# EAGLE board matrix-m24sr_gerber_bottom (EAGLE 7.7.0), part 1 of 7
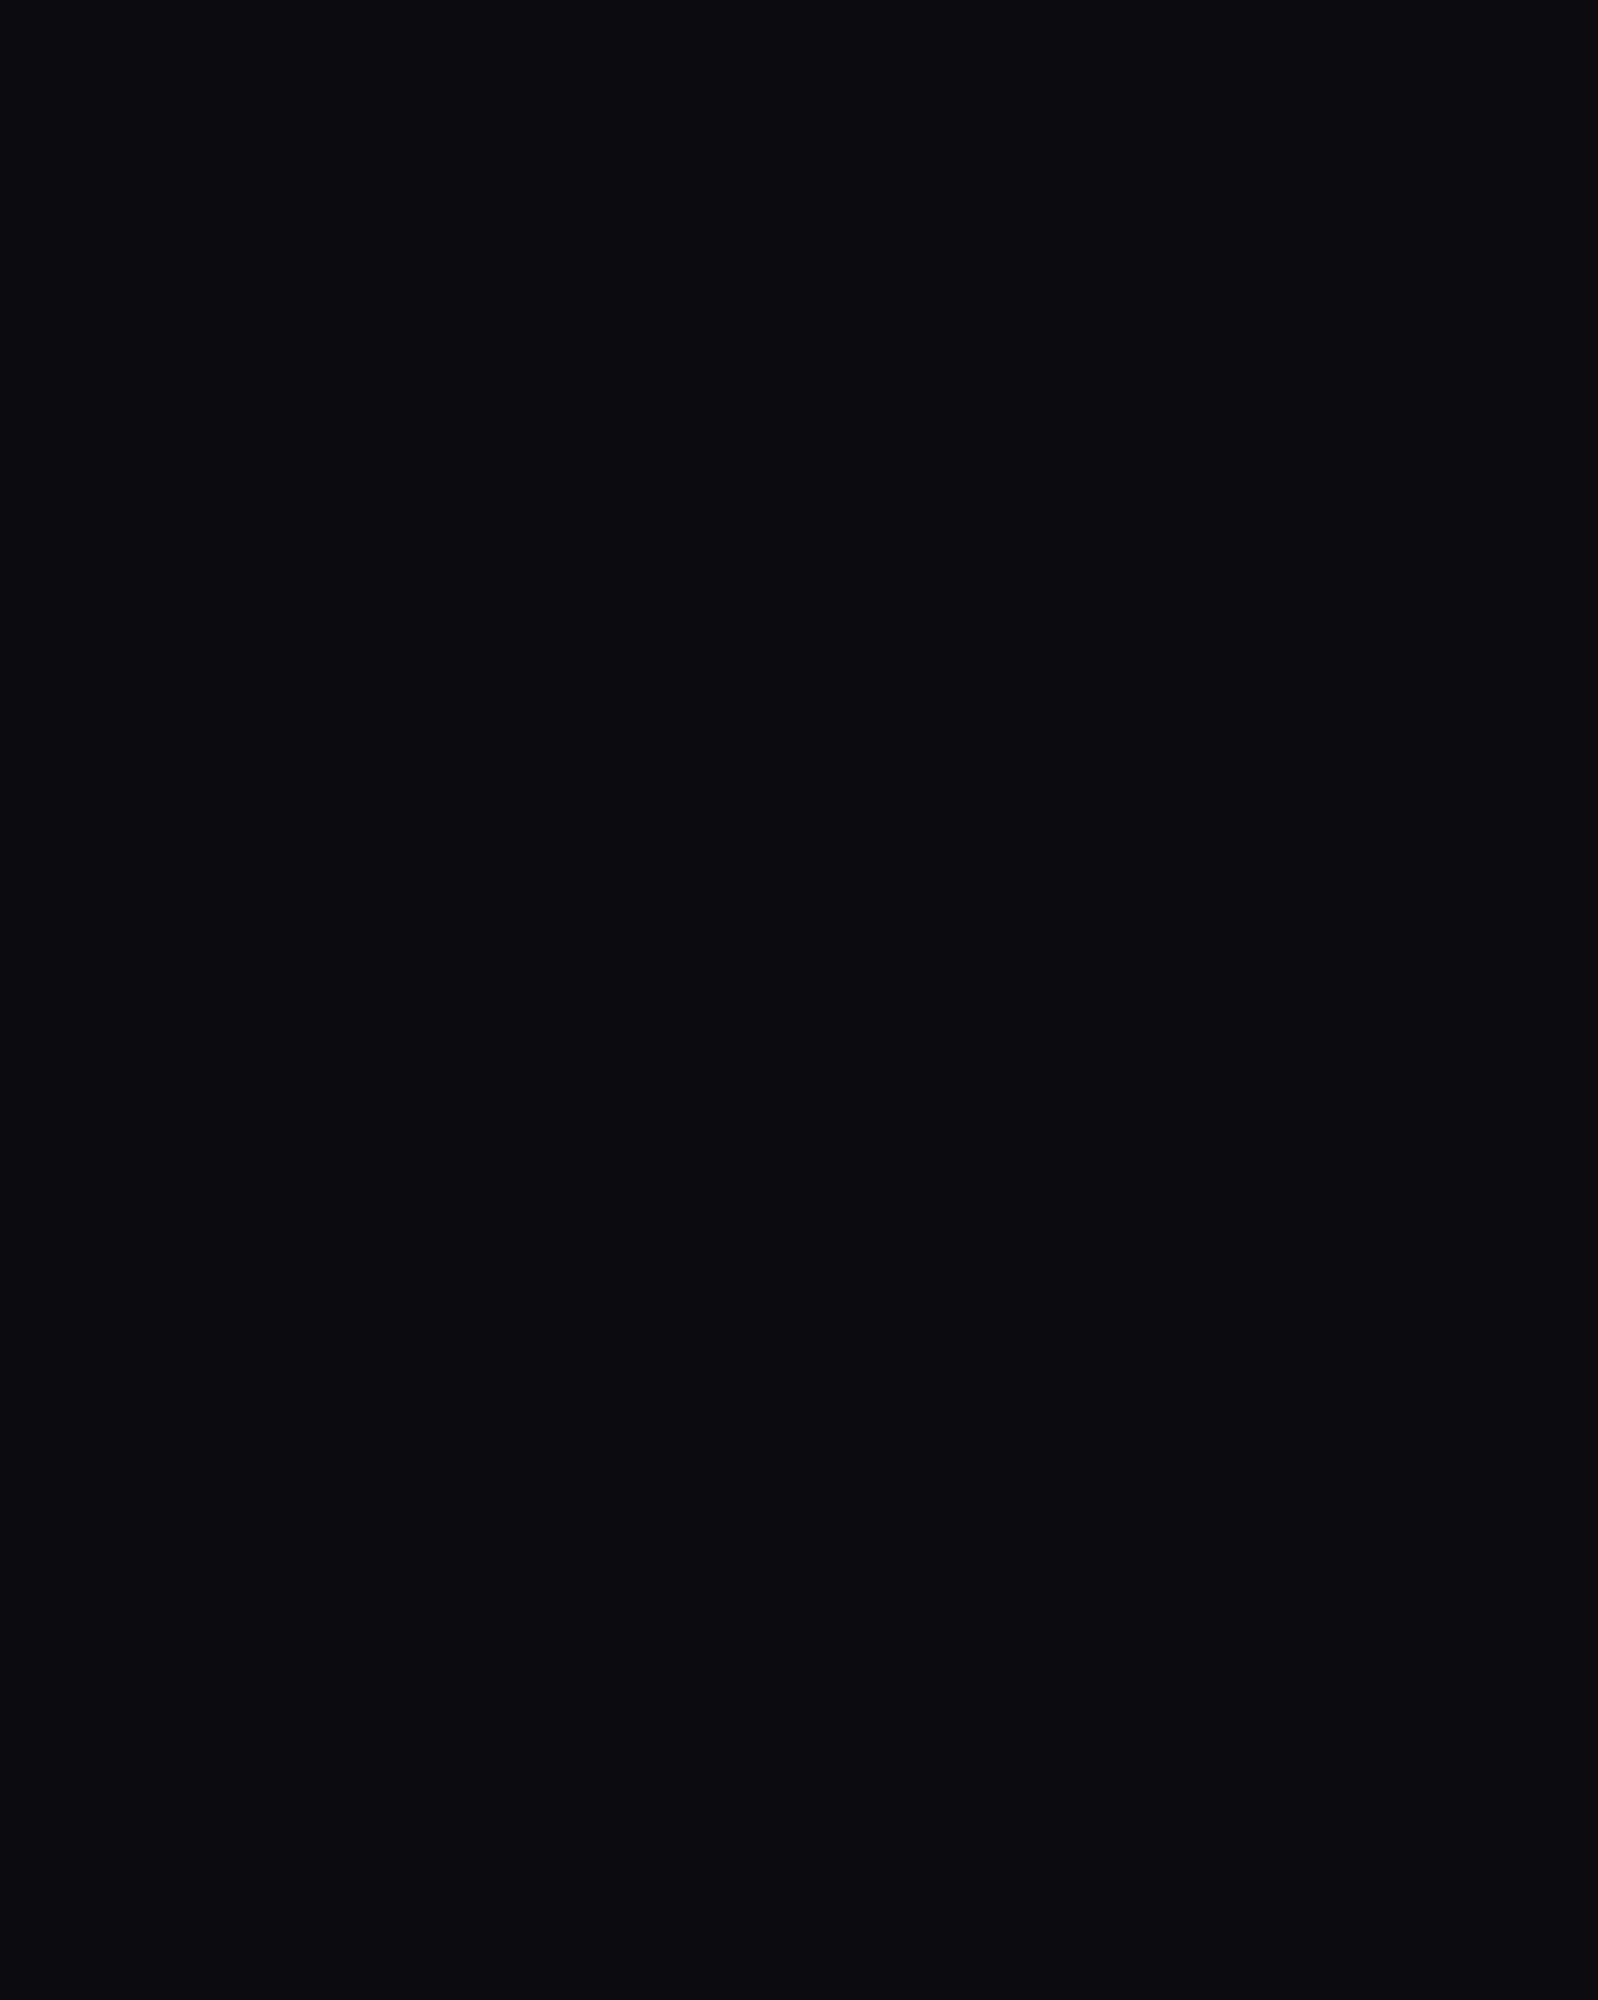
[diagram p0: board, top side]
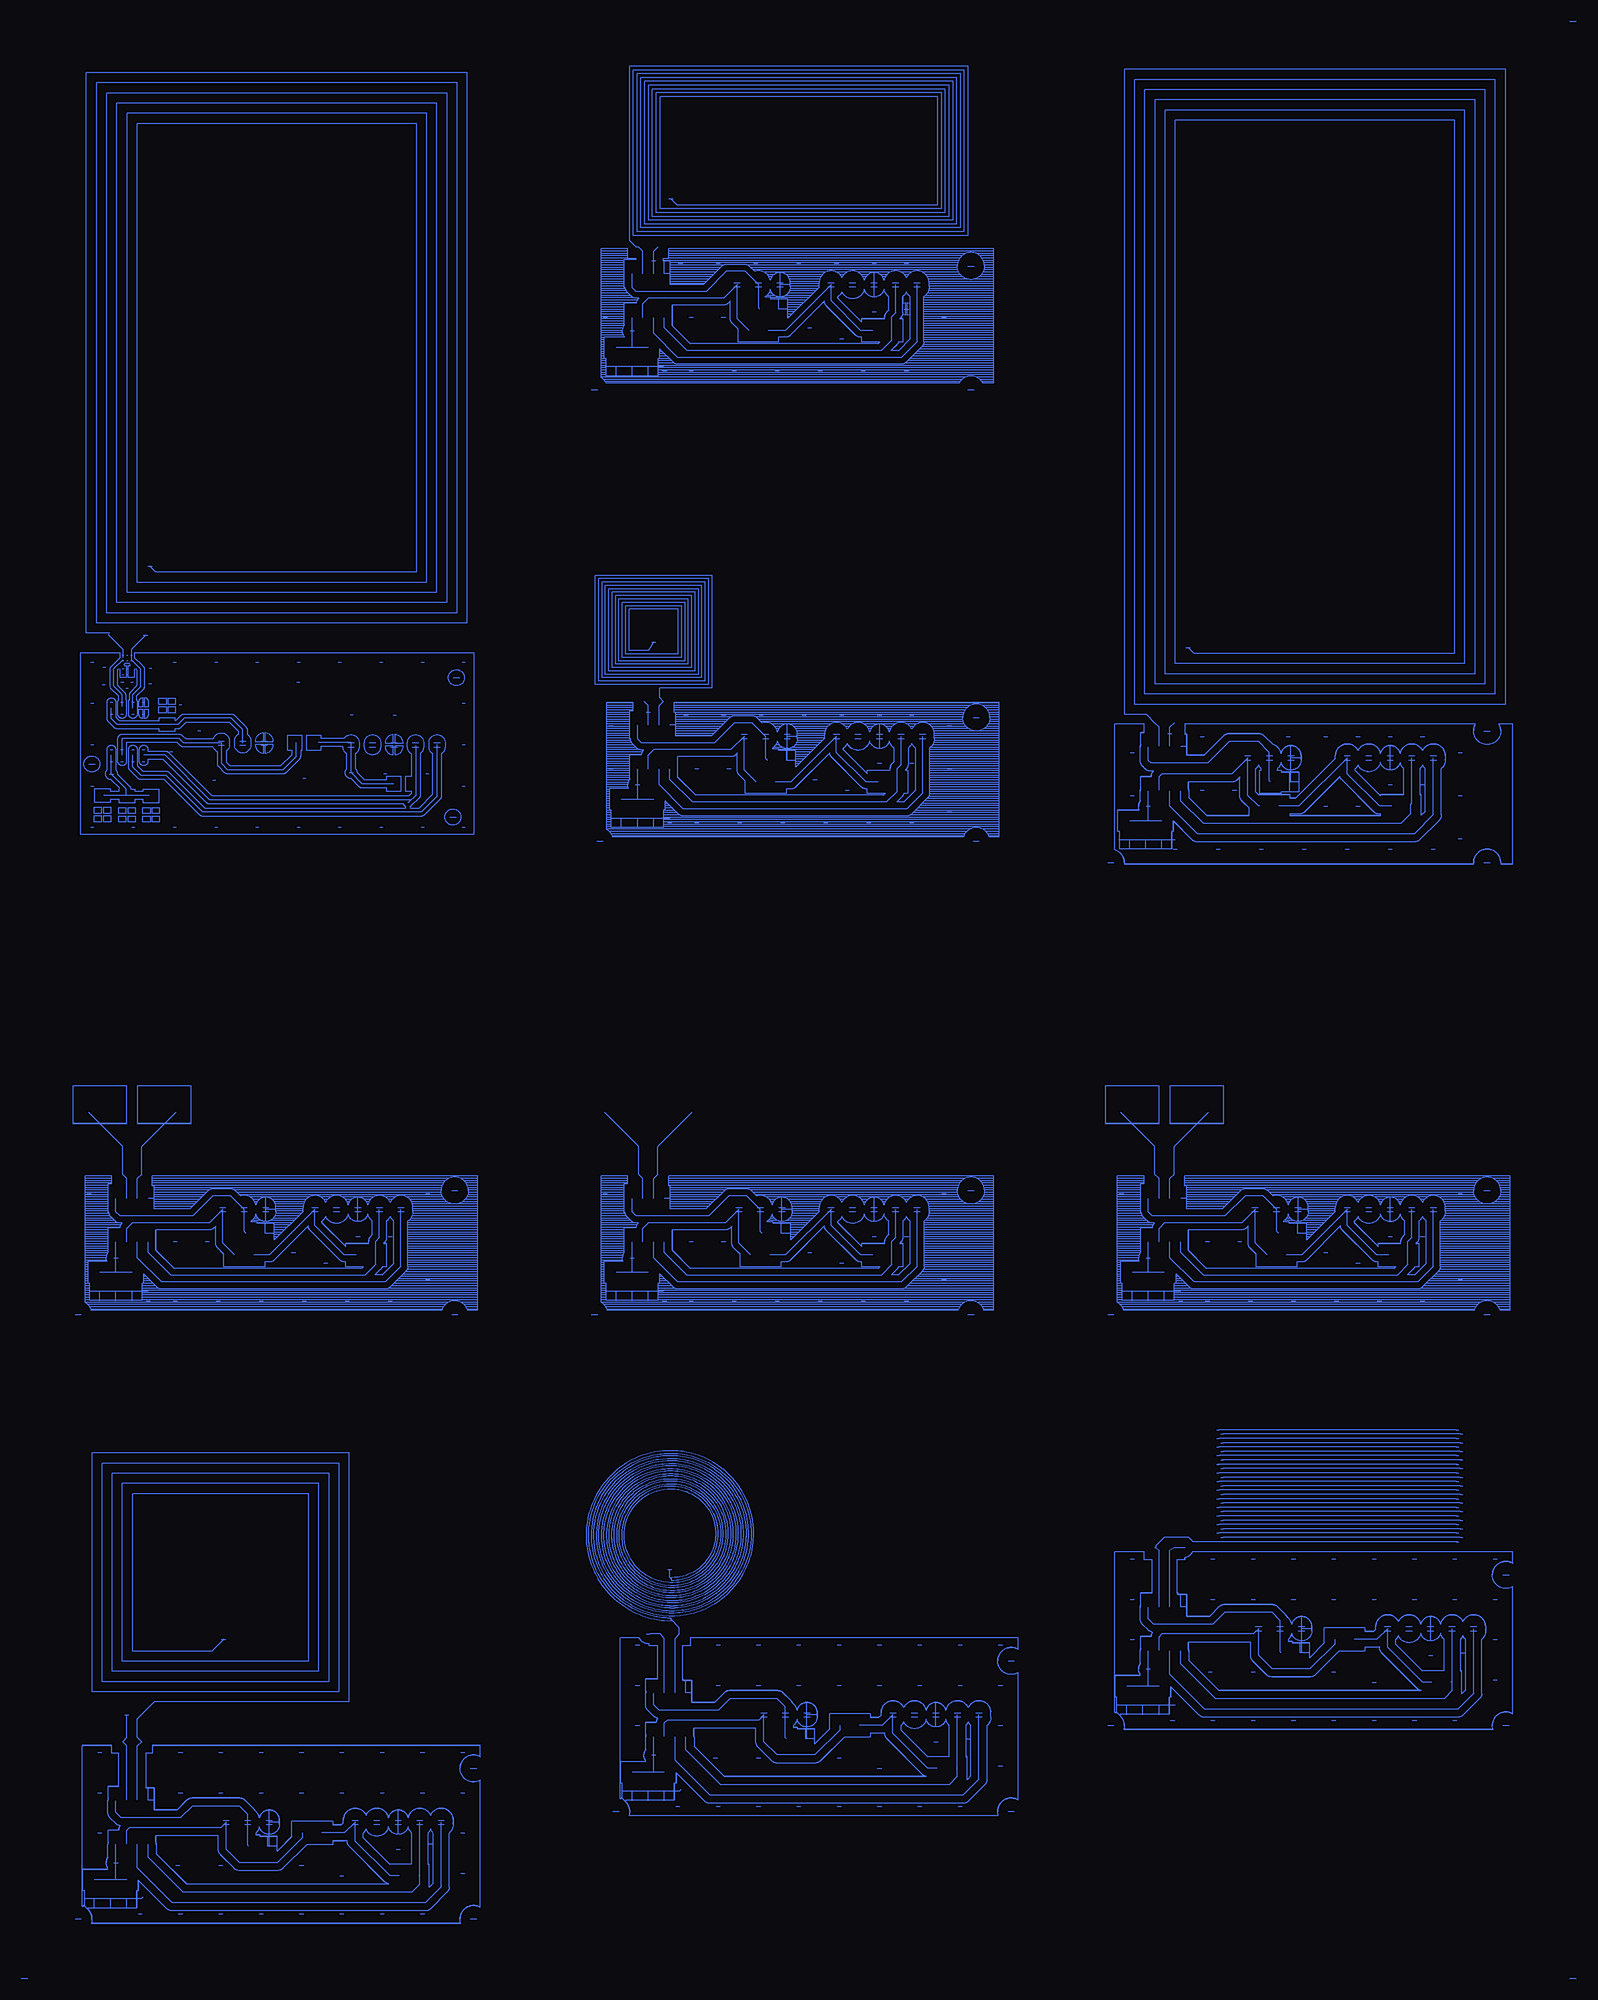
[diagram p1: board, bottom side, seen from below]

No outline drawn. Coordinates in mm, seen from the top.
Copper layers (1*16): Top 0.035mm / dielectric 1.5mm / Bottom 0.035mm
Design rules "default": minimum track width 10mil, minimum drill 24mil, track to track 8mil, track to pad 8mil, pad to pad 8mil, via to via 8mil, smd to smd 8mil, copper to edge 40mil, drill to drill 8mil, minimum pad ring 10mil, minimum via ring 8mil, stop-mask expansion 4mil, vias tented up to drill 0mil, thermal gap 10mil

## Placement (x,y rotation side)

## Tracks (layer width: path | path; a pad name or v marks a point on that pad's centre or on a via)
S$1
  Bottom 0.025: 155.29,85.33 154.63,85.33 154.52,85.36 154.42,85.39 154.28,85.46 154.19,85.54 150.15,89.58 150.14,89.56 150.11,89.38 150.06,89.28 149.98,89.16 149.89,89.06 146.4,85.57 146.28,85.48 146.15,85.41 146.04,85.37 145.95,85.36 145.71,85.35 | 155.29,85.33 155.29,84.78 160.1,84.78 160.1,86.26 | 160.1,86.26 160.1,86.27 160.71,86.89 160.89,87.07 160.96,87.17 161,87.25 161.04,87.4 161.06,87.53 161.06,87.57 | 161.06,87.57 161.06,89.55 | 161.06,89.55 161.07,89.55 161.26,89.36 161.36,89.27 161.54,89.19 161.71,89.14 168.12,89.14 168.12,86.74 165.98,84.6 | 143.79,84.6 143.78,84.6 143.61,84.78 145.71,84.79 | 145.71,84.79 145.71,85.35 | 143.79,84.6 143.61,84.78 145.71,84.78 145.71,84.79 | 143.79,84.6 165.98,84.6 | 165.98,84.6 168.12,86.74 168.12,89.14 161.8,89.14 161.75,89.14 161.69,89.15 161.63,89.16 161.58,89.17 161.52,89.19 161.47,89.22 161.42,89.24 161.37,89.27 161.32,89.31 161.28,89.34 161.23,89.38 161.06,89.56 161.06,89.55 | 161.06,87.57 161.06,87.55 161.06,87.5 161.05,87.44 161.04,87.38 161.02,87.33 161.01,87.27 160.98,87.22 160.96,87.17 160.93,87.12 160.89,87.07 160.86,87.03 160.81,86.98 160.1,86.26 | 155.29,85.33 154.72,85.33 154.66,85.33 154.6,85.34 154.55,85.35 154.49,85.36 154.44,85.39 154.38,85.41 154.33,85.43 154.28,85.46 154.24,85.5 154.19,85.53 154.15,85.57 150.14,89.58 150.14,89.52 150.13,89.47 150.11,89.41 150.09,89.36 150.07,89.31 150.04,89.26 150.01,89.21 149.98,89.16 149.95,89.12 149.91,89.08 146.41,85.57 146.36,85.53 146.32,85.5 146.27,85.47 146.22,85.44 146.17,85.42 146.12,85.4 146.06,85.38 146.01,85.36 145.96,85.36 145.9,85.35 145.71,85.35
S$3
  Bottom 0.025: 82.57,145.99 82.56,145.99 82.35,146.03 82.23,146.06 82.03,146.16 81.92,146.25 81.78,146.37 81.64,146.55 81.57,146.69 81.53,146.79 81.5,146.89 81.49,146.89 81.46,146.76 81.4,146.61 81.35,146.5 81.26,146.36 81.16,146.24 81.01,146.1 80.95,146.06 80.95,146.05 | 82.57,145.99 82.79,145.99 82.98,146.03 83.1,146.06 83.29,146.16 83.43,146.26 83.57,146.4 83.57,146.41 83.61,146.44 83.69,146.56 83.74,146.66 83.8,146.78 83.82,146.89 83.83,146.89 83.86,146.78 83.91,146.64 83.97,146.51 84.05,146.38 84.21,146.2 84.4,146.03 84.54,145.95 84.68,145.88 84.89,145.82 85.13,145.78 85.31,145.78 85.31,145.79 85.47,145.81 85.62,145.84 85.81,145.92 85.95,146 86.08,146.09 86.19,146.19 86.32,146.34 86.42,146.48 86.46,146.56 86.47,146.58 86.49,146.57 86.57,146.41 86.69,146.25 86.83,146.13 86.94,146.04 86.94,145.86 84.11,143.04 | 84.11,143.42 81.42,143.42 | 81.42,143.42 81.42,143.65 | 81.42,143.65 81.42,143.66 81.39,143.83 81.35,143.96 81.31,144.04 81.25,144.15 81.16,144.25 80.95,144.45 80.95,144.46 | 80.95,144.46 80.95,146.05 | 80.95,144.46 81.17,144.24 81.18,144.22 81.22,144.18 81.25,144.13 81.29,144.09 81.32,144.04 81.34,143.99 81.36,143.93 81.38,143.88 81.39,143.82 81.4,143.76 81.41,143.71 81.42,143.65 | 81.42,143.42 84.11,143.42 | 84.11,143.04 84.11,143.42 | 84.11,143.04 86.94,145.87 86.94,146.04 86.9,146.06 86.83,146.12 86.75,146.19 86.69,146.26 86.62,146.34 86.57,146.42 86.52,146.5 86.47,146.59 86.44,146.52 86.39,146.43 86.33,146.35 86.27,146.28 86.21,146.21 86.14,146.14 86.06,146.07 85.98,146.02 85.9,145.97 85.81,145.92 85.72,145.88 85.63,145.85 85.53,145.82 85.44,145.8 85.34,145.79 85.25,145.78 85.15,145.78 85.05,145.79 84.95,145.8 84.86,145.82 84.76,145.85 84.67,145.89 84.58,145.93 84.5,145.97 84.41,146.03 84.33,146.08 84.26,146.15 84.19,146.22 84.12,146.29 84.06,146.37 84.01,146.45 83.96,146.53 83.92,146.62 83.88,146.71 83.85,146.8 83.83,146.9 83.83,146.89 83.8,146.81 83.77,146.73 83.74,146.65 83.7,146.58 83.66,146.51 83.6,146.44 83.55,146.38 83.49,146.32 83.43,146.26 83.36,146.21 83.29,146.16 83.22,146.12 83.15,146.09 83.07,146.06 82.99,146.03 82.91,146.01 82.82,146 82.74,145.99 82.66,145.98 82.57,145.99
  Bottom 0.025: 82.57,145.99 82.49,146 82.41,146.01 82.33,146.03 82.25,146.06 82.17,146.09 82.09,146.13 82.02,146.17 81.95,146.22 81.89,146.27 81.83,146.32 81.77,146.38 81.71,146.45 81.66,146.52 81.62,146.59 81.58,146.66 81.55,146.74 81.52,146.82 81.5,146.9 81.49,146.85 81.46,146.75 81.42,146.66 81.39,146.57 81.34,146.49 81.29,146.4 81.23,146.32 81.17,146.25 81.1,146.18 81.03,146.11 80.95,146.05
S$4
  Bottom 0.025: 93.7,141.21 93.03,141.21 92.93,141.24 92.82,141.27 92.69,141.34 92.59,141.42 88.55,145.46 88.54,145.44 88.55,145.44 88.51,145.26 88.46,145.16 88.38,145.04 88.3,144.94 84.8,141.45 84.68,141.36 84.56,141.29 84.45,141.25 84.35,141.24 84.11,141.23 | 93.7,141.21 93.7,140.66 98.5,140.66 98.5,142.14 | 98.5,142.14 98.5,142.15 99.12,142.77 99.3,142.95 99.36,143.04 99.4,143.13 99.45,143.28 99.47,143.41 99.47,143.45 | 99.47,143.45 99.47,145.43 | 99.47,145.43 99.67,145.24 99.77,145.15 99.94,145.07 100.11,145.02 106.52,145.02 106.52,142.62 104.38,140.48 | 82.19,140.48 82.19,140.49 82.02,140.66 84.11,140.67 | 84.11,140.67 84.11,141.23 | 82.19,140.48 82.01,140.66 84.11,140.66 84.11,140.67 | 82.19,140.48 104.38,140.48 | 104.38,140.48 106.52,142.62 106.52,145.02 100.21,145.02 100.15,145.02 100.09,145.03 100.03,145.04 99.98,145.05 99.93,145.07 99.87,145.1 99.82,145.12 99.77,145.15 99.72,145.19 99.68,145.22 99.64,145.26 99.47,145.44 99.47,145.43 | 99.47,143.45 99.46,143.43 99.46,143.38 99.45,143.32 99.44,143.26 99.43,143.21 99.41,143.15 99.39,143.1 99.36,143.05 99.33,143 99.3,142.95 99.26,142.91 99.22,142.87 98.5,142.14 | 93.7,141.21 93.12,141.21 93.07,141.21 93.01,141.22 92.95,141.23 92.9,141.24 92.84,141.26 92.79,141.29 92.74,141.31 92.69,141.34 92.64,141.38 92.6,141.41 92.55,141.45 88.55,145.46 88.54,145.4 88.53,145.35 88.52,145.29 88.5,145.24 88.48,145.19 88.45,145.14 88.42,145.09 88.39,145.04 88.35,145 88.32,144.96 84.81,141.45 84.77,141.41 84.72,141.38 84.68,141.35 84.63,141.32 84.58,141.3 84.52,141.28 84.47,141.26 84.42,141.24 84.36,141.24 84.31,141.23 84.11,141.23
S$5
  Bottom 0.025: 23.45,90.85 23.4,90.73 23.34,90.63 23.16,90.42 22.99,90.29 22.82,90.2 22.72,90.16 22.57,90.12 22.49,90.11 22.49,90.1 22.2,90.1 21.99,90.15 21.86,90.2 21.68,90.3 21.53,90.41 21.41,90.54 21.31,90.69 21.25,90.78 21.19,90.93 21.18,91 21.17,91 21.13,90.88 21.06,90.7 21.01,90.6 20.87,90.4 20.71,90.24 20.62,90.17 | 23.45,90.85 23.47,90.89 23.5,91 23.51,91 23.52,90.94 23.58,90.75 23.68,90.56 23.81,90.38 24.01,90.19 24.2,90.07 24.34,90 24.48,89.95 24.73,89.9 25.05,89.9 25.05,89.91 25.14,89.92 25.29,89.96 25.41,90 25.65,90.12 25.81,90.25 25.93,90.37 26.05,90.52 26.15,90.7 26.16,90.7 26.18,90.66 26.26,90.51 26.39,90.36 26.46,90.28 26.61,90.16 26.61,89.98 23.79,87.16 | 23.79,87.54 21.09,87.54 | 21.09,87.54 21.09,87.77 | 21.09,87.77 21.09,87.85 21.08,87.86 21.08,87.91 21.04,88.04 20.98,88.17 20.92,88.27 20.83,88.37 20.62,88.57 20.62,88.58 | 20.62,88.58 20.62,90.17 | 20.62,88.58 20.85,88.36 20.86,88.34 20.89,88.3 20.93,88.25 20.96,88.21 20.99,88.16 21.02,88.11 21.04,88.05 21.06,88 21.07,87.94 21.08,87.88 21.09,87.83 21.09,87.77 | 21.09,87.54 23.79,87.54 | 23.79,87.16 23.79,87.54 | 23.79,87.16 26.61,89.98 26.61,90.16 26.58,90.18 26.5,90.24 26.43,90.31 26.36,90.38 26.3,90.46 26.24,90.54 26.19,90.62 26.15,90.71 26.11,90.64 26.06,90.55 26.01,90.47 25.95,90.4 25.88,90.33 25.81,90.26 25.73,90.19 25.66,90.14 25.57,90.09 25.49,90.04 25.4,90 25.3,89.97 25.21,89.94 25.12,89.92 25.02,89.91 24.92,89.9 24.82,89.9 24.72,89.91 24.63,89.92 24.53,89.94 24.44,89.97 24.35,90.01 24.26,90.05 24.17,90.09 24.09,90.14 24.01,90.2 23.93,90.27 23.86,90.33 23.8,90.41 23.74,90.48 23.68,90.57 23.64,90.65 23.59,90.74 23.56,90.83 23.53,90.92 23.5,91.02 23.5,91.01 23.48,90.93 23.45,90.85
  Bottom 0.025: 23.45,90.85 23.41,90.77 23.37,90.7 23.33,90.63 23.28,90.56 23.23,90.5 23.17,90.44 23.1,90.38 23.04,90.33 22.97,90.28 22.9,90.24 22.82,90.21 22.74,90.17 22.66,90.15 22.58,90.13 22.5,90.12 22.42,90.11 22.33,90.1 22.25,90.11 22.16,90.12 22.08,90.13 22,90.15 21.92,90.18 21.84,90.21 21.77,90.25 21.7,90.29 21.63,90.34 21.56,90.39 21.5,90.44 21.44,90.5 21.39,90.57 21.34,90.64 21.3,90.71 21.26,90.78 21.22,90.86 21.19,90.94 21.17,91.02 21.16,90.97 21.13,90.87 21.1,90.78 21.06,90.69 21.02,90.61 20.96,90.52 20.91,90.44 20.84,90.37 20.77,90.3 20.7,90.23 20.62,90.17
S$7
  Bottom 0.025: 79.93,90.17 79.81,90.27 79.64,90.46 79.55,90.59 79.49,90.71 | 79.93,90.17 79.93,88.23 | 79.93,88.23 79.93,88.2 79.95,88.06 79.98,87.92 80.04,87.82 80.14,87.69 80.28,87.54 79.94,87.54 | 79.94,87.54 79.94,84.79 | 79.94,84.79 80.43,84.78 | 80.43,84.78 80.48,84.68 80.55,84.54 80.64,84.45 | 80.64,84.45 81.29,83.8 | 80.43,83.8 80.42,83.8 79.05,85.18 | 79.49,90.71 79.36,90.48 79.25,90.36 79.11,90.22 79.05,90.17 | 79.05,85.18 79.05,90.17 | 79.05,85.18 80.43,83.8 | 80.43,83.8 81.29,83.8 | 80.64,84.45 81.29,83.8 | 80.64,84.45 80.6,84.48 80.57,84.53 80.53,84.57 80.5,84.62 80.48,84.67 80.45,84.72 80.43,84.78 | 80.43,84.78 79.94,84.78 79.94,84.79 | 79.94,87.54 80.28,87.54 80.17,87.64 80.16,87.66 80.12,87.7 80.09,87.74 80.06,87.79 80.03,87.84 80,87.89 79.98,87.95 79.96,88 79.95,88.06 79.94,88.11 79.93,88.17 79.93,88.23 | 79.93,90.17 79.92,90.18 79.84,90.24 79.77,90.31 79.7,90.38 79.64,90.46 79.58,90.54 79.53,90.62 79.49,90.71 | 79.49,90.71 79.48,90.69 79.44,90.61 79.38,90.52 79.33,90.44 79.26,90.37 79.19,90.3 79.12,90.23 79.05,90.17
S$8
  Bottom 0.025: 140.89,90.17 140.77,90.27 140.6,90.46 140.51,90.59 140.45,90.71 | 140.89,90.17 140.89,88.23 | 140.89,88.23 140.89,88.2 140.91,88.06 140.94,87.92 141,87.82 141.1,87.69 141.24,87.54 140.9,87.54 | 140.9,87.54 140.9,84.79 | 140.9,84.79 141.39,84.78 | 141.39,84.78 141.44,84.68 141.51,84.54 141.6,84.45 | 141.6,84.45 142.25,83.8 | 141.39,83.8 141.38,83.8 140,85.18 | 140.45,90.71 140.32,90.48 140.21,90.36 140.07,90.22 140,90.17 | 140,85.18 140,90.17 | 140,85.18 141.39,83.8 | 141.39,83.8 142.25,83.8 | 141.6,84.45 142.25,83.8 | 141.6,84.45 141.56,84.48 141.53,84.53 141.49,84.57 141.46,84.62 141.44,84.67 141.41,84.72 141.39,84.78 | 141.39,84.78 140.9,84.78 140.9,84.79 | 140.9,87.54 141.24,87.54 141.13,87.64 141.12,87.66 141.08,87.7 141.05,87.74 141.02,87.79 140.99,87.84 140.96,87.89 140.94,87.95 140.92,88 140.91,88.06 140.9,88.11 140.89,88.17 140.89,88.23 | 140.89,90.17 140.88,90.18 140.8,90.24 140.73,90.31 140.66,90.38 140.6,90.46 140.54,90.54 140.49,90.62 140.45,90.71 | 140.45,90.71 140.44,90.69 140.4,90.61 140.34,90.52 140.29,90.44 140.22,90.37 140.16,90.3 140.08,90.23 140,90.17
S$9
  Bottom 0.025: 94.33,85.33 93.67,85.33 93.56,85.36 93.46,85.39 93.33,85.46 93.23,85.54 89.19,89.58 89.18,89.56 89.15,89.38 89.1,89.28 89.02,89.16 88.93,89.06 85.44,85.57 85.32,85.48 85.19,85.41 85.08,85.37 84.99,85.36 84.75,85.35 | 94.33,85.33 94.33,84.78 99.14,84.78 99.14,86.26 | 99.14,86.26 99.14,86.27 99.75,86.89 99.93,87.07 100,87.17 100.04,87.25 100.08,87.4 100.1,87.53 100.1,87.57 | 100.1,87.57 100.1,89.55 | 100.1,89.55 100.11,89.55 100.3,89.36 100.4,89.27 100.58,89.19 100.75,89.14 107.16,89.14 107.16,86.74 105.02,84.6 | 82.83,84.6 82.82,84.6 82.65,84.78 84.75,84.79 | 84.75,84.79 84.75,85.35 | 82.83,84.6 82.65,84.78 84.75,84.78 84.75,84.79 | 82.83,84.6 105.02,84.6 | 105.02,84.6 107.16,86.74 107.16,89.14 100.84,89.14 100.78,89.14 100.73,89.15 100.67,89.16 100.62,89.17 100.56,89.19 100.51,89.22 100.46,89.24 100.41,89.27 100.36,89.31 100.31,89.34 100.27,89.38 100.1,89.56 100.1,89.55 | 100.1,87.57 100.1,87.55 100.1,87.5 100.09,87.44 100.08,87.38 100.06,87.33 100.05,87.27 100.02,87.22 100,87.17 99.97,87.12 99.93,87.07 99.9,87.03 99.86,86.98 99.14,86.26 | 94.33,85.33 93.76,85.33 93.7,85.33 93.64,85.34 93.59,85.35 93.53,85.36 93.48,85.39 93.42,85.41 93.37,85.43 93.32,85.46 93.28,85.5 93.23,85.53 93.19,85.57 89.18,89.58 89.18,89.52 89.17,89.47 89.15,89.41 89.13,89.36 89.11,89.31 89.08,89.26 89.06,89.21 89.02,89.16 88.99,89.12 88.95,89.08 85.45,85.57 85.4,85.53 85.36,85.5 85.31,85.47 85.26,85.44 85.21,85.42 85.16,85.4 85.11,85.38 85.05,85.36 85,85.36 84.94,85.35 84.75,85.35
S$10
  Bottom 0.025: 33.37,85.33 32.71,85.33 32.6,85.36 32.5,85.39 32.37,85.46 32.27,85.54 28.23,89.58 28.22,89.56 28.19,89.38 28.14,89.28 28.06,89.16 27.97,89.06 24.48,85.57 24.36,85.48 24.23,85.41 24.12,85.37 24.03,85.36 23.79,85.35 | 33.37,85.33 33.37,84.78 38.18,84.78 38.18,86.26 | 38.18,86.26 38.18,86.27 38.79,86.89 38.97,87.07 39.03,87.17 39.08,87.25 39.12,87.4 39.14,87.53 39.14,87.57 | 39.14,87.57 39.14,89.55 | 39.14,89.55 39.15,89.55 39.34,89.36 39.44,89.27 39.62,89.19 39.79,89.14 46.2,89.14 46.2,86.74 44.06,84.6 | 21.87,84.6 21.86,84.6 21.69,84.78 23.79,84.79 | 23.79,84.79 23.79,85.35 | 21.87,84.6 21.69,84.78 23.79,84.78 23.79,84.79 | 21.87,84.6 44.06,84.6 | 44.06,84.6 46.2,86.74 46.2,89.14 39.88,89.14 39.83,89.14 39.77,89.15 39.71,89.16 39.66,89.17 39.6,89.19 39.55,89.22 39.5,89.24 39.45,89.27 39.4,89.31 39.35,89.34 39.31,89.38 39.14,89.56 39.14,89.55 | 39.14,87.57 39.14,87.55 39.14,87.5 39.13,87.44 39.12,87.38 39.1,87.33 39.09,87.27 39.06,87.22 39.03,87.17 39.01,87.12 38.97,87.07 38.94,87.03 38.9,86.98 38.18,86.26 | 33.37,85.33 32.8,85.33 32.74,85.33 32.69,85.34 32.63,85.35 32.57,85.36 32.52,85.39 32.46,85.41 32.41,85.43 32.36,85.46 32.32,85.5 32.27,85.53 32.23,85.57 28.22,89.58 28.22,89.52 28.21,89.47 28.19,89.41 28.17,89.36 28.15,89.31 28.12,89.26 28.09,89.21 28.06,89.16 28.03,89.12 27.99,89.08 24.49,85.57 24.44,85.53 24.4,85.5 24.35,85.47 24.3,85.44 24.25,85.42 24.2,85.4 24.14,85.38 24.09,85.36 24.04,85.36 23.98,85.35 23.79,85.35
S$11
  Bottom 0.025: 177.91,101.72 171.56,101.72 | 171.56,101.72 171.56,106.16 | 171.56,106.16 177.91,106.16 | 177.91,106.16 177.91,101.72 | 177.91,101.72 177.91,101.71 171.56,101.71 171.56,101.72 | 171.56,106.16 177.91,106.16
S$12
  Bottom 0.025: 170.29,101.72 163.94,101.72 | 163.94,101.72 163.94,106.16 | 163.94,106.16 170.29,106.16 | 170.29,106.16 170.29,101.72 | 170.29,101.72 170.29,101.71 163.94,101.71 163.94,101.72 | 163.94,106.16 170.29,106.16
S$13
  Bottom 0.025: 18.85,143.61 18.71,143.75 18.6,143.92 18.54,144.04 18.53,144.04 18.51,144.02 18.47,143.94 18.38,143.8 18.3,143.7 18.21,143.61 | 18.85,143.61 18.85,140.57 | 18.85,140.57 18.66,140.56 | 18.66,138.12 18.21,138.57 | 18.21,138.57 18.21,143.61 | 18.21,138.57 18.66,138.12 | 18.66,138.12 18.66,140.56 | 18.66,140.56 18.85,140.56 18.85,140.57 | 18.85,143.61 18.81,143.65 18.74,143.72 18.68,143.8 18.62,143.88 18.57,143.96 18.53,144.05 18.51,144 18.46,143.92 18.41,143.84 18.34,143.76 18.28,143.68 18.21,143.61
S$14
  Bottom 0.025: 34.22,138.23 33.01,138.23 32.89,138.26 32.77,138.3 32.66,138.36 32.56,138.42 32.49,138.48 28.31,142.65 28.23,142.51 28.16,142.4 27.92,142.15 24.26,138.48 24.11,138.37 23.95,138.29 23.74,138.24 23.47,138.23 | 34.22,138.23 34.22,138.06 | 34.22,138.06 23.47,138.06 | 23.47,138.06 23.47,138.23 | 23.47,138.06 34.22,138.06 | 34.22,138.23 33.12,138.23 33.05,138.23 32.98,138.24 32.92,138.25 32.85,138.27 32.79,138.29 32.73,138.32 32.67,138.35 32.61,138.38 32.56,138.42 32.51,138.46 32.46,138.51 28.31,142.66 28.31,142.65 28.28,142.59 28.25,142.53 28.22,142.47 28.18,142.41 28.14,142.36 28.09,142.32 24.27,138.49 24.22,138.45 24.17,138.41 24.11,138.37 24.06,138.34 24,138.31 23.93,138.28 23.87,138.26 23.8,138.25 23.74,138.23 23.68,138.23 23.61,138.23 23.47,138.23
S$15
  Bottom 0.025: 46.15,140.97 46.16,141.13 46.2,141.28 46.2,142.04 40.95,142.04 40.83,142.07 40.7,142.11 40.59,142.17 40.49,142.23 40.43,142.29 40.13,142.59 40.12,142.59 | 46.15,140.97 46.15,140.21 | 46.15,140.21 44.01,138.06 39.03,138.06 | 39.03,138.06 39.03,138.97 | 39.03,138.97 39.68,139.62 39.92,139.87 39.99,139.97 40.03,140.07 40.06,140.12 40.1,140.24 40.12,140.41 40.12,140.45 | 40.12,140.45 40.12,142.59 | 39.03,138.06 44,138.06 46.15,140.21 | 46.15,140.97 46.15,140.99 46.15,141.02 46.15,141.08 46.16,141.15 46.17,141.21 46.2,141.28 46.2,142.04 41.05,142.04 40.99,142.04 40.92,142.05 40.86,142.06 40.79,142.08 40.73,142.1 40.67,142.13 40.61,142.16 40.55,142.19 40.5,142.23 40.45,142.27 40.4,142.32 40.12,142.6 40.12,142.59 | 40.12,140.45 40.12,140.43 40.11,140.37 40.11,140.3 40.09,140.23 40.08,140.17 40.05,140.11 40.03,140.04 40,139.99 39.96,139.93 39.93,139.88 39.88,139.82 39.84,139.78 39.03,138.97
S$16
  Bottom 0.025: 87.2,90.54 87.11,90.71 87.09,90.68 87.05,90.6 86.96,90.46 86.83,90.31 86.72,90.21 86.59,90.12 86.45,90.04 86.25,89.96 86.11,89.93 85.94,89.91 85.94,89.9 85.76,89.9 85.52,89.94 85.32,90 85.17,90.07 85.03,90.16 84.84,90.32 84.68,90.5 84.6,90.64 84.54,90.76 84.49,90.92 84.47,91.01 84.45,90.99 84.43,90.9 84.36,90.75 84.31,90.65 84.24,90.56 | 87.2,90.54 87.33,90.37 87.47,90.25 87.57,90.16 87.57,89.98 84.75,87.16 | 84.75,87.54 82.05,87.54 | 82.05,87.54 82.05,87.77 | 82.05,87.77 82.05,87.78 82.03,87.95 81.99,88.08 81.95,88.16 81.88,88.27 81.8,88.37 81.58,88.57 81.58,88.58 | 83.21,90.11 83.19,90.11 82.99,90.14 82.86,90.19 82.67,90.28 82.55,90.37 82.42,90.48 82.28,90.67 82.21,90.8 82.18,90.87 82.15,90.94 82.14,91.01 82.12,91 82.09,90.89 82.04,90.73 81.99,90.62 81.89,90.48 81.79,90.36 81.64,90.22 81.58,90.17 | 83.21,90.11 83.43,90.11 83.61,90.14 83.74,90.19 83.92,90.28 84.06,90.38 84.21,90.52 84.21,90.53 84.24,90.56 | 81.58,88.58 81.58,90.17 | 81.58,88.58 81.81,88.36 81.82,88.34 81.85,88.3 81.89,88.25 81.92,88.21 81.95,88.16 81.98,88.11 82,88.05 82.02,88 82.03,87.94 82.04,87.88 82.05,87.83 82.05,87.77 | 82.05,87.54 84.75,87.54 | 84.75,87.16 84.75,87.54 | 84.75,87.16 87.57,89.98 87.57,90.16 87.54,90.18 87.46,90.24 87.39,90.31 87.32,90.38 87.26,90.46 87.2,90.54 | 87.2,90.54 87.15,90.62 87.11,90.71 87.07,90.64 87.02,90.55 86.97,90.47 86.91,90.4 86.84,90.33 86.77,90.26 86.69,90.19 86.62,90.14 86.53,90.09 86.45,90.04 86.36,90 86.26,89.97 86.17,89.94 86.08,89.92 85.98,89.91 85.88,89.9 85.78,89.9 85.68,89.91 85.59,89.92 85.49,89.94 85.4,89.97 85.31,90.01 85.22,90.05 85.13,90.09 85.05,90.14 84.97,90.2 84.89,90.27 84.82,90.33 84.76,90.41 84.7,90.48 84.64,90.57 84.59,90.65 84.55,90.74 84.52,90.83 84.49,90.92 84.46,91.02 84.46,91.01 84.44,90.93 84.41,90.85 84.37,90.77 84.33,90.7 84.29,90.63 84.24,90.56
  Bottom 0.025: 84.24,90.56 84.19,90.5 84.13,90.44 84.06,90.38 84,90.33 83.93,90.28 83.86,90.24 83.78,90.21 83.7,90.17 83.62,90.15 83.54,90.13 83.46,90.12 83.38,90.11 83.29,90.1 83.21,90.11 | 83.21,90.11 83.12,90.12 83.04,90.13 82.96,90.15 82.88,90.18 82.8,90.21 82.73,90.25 82.66,90.29 82.59,90.34 82.52,90.39 82.46,90.44 82.4,90.5 82.35,90.57 82.3,90.64 82.25,90.71 82.22,90.78 82.18,90.86 82.15,90.94 82.13,91.02 82.12,90.97 82.09,90.87 82.06,90.78 82.02,90.69 81.98,90.61 81.92,90.52 81.87,90.44 81.8,90.37 81.73,90.3 81.66,90.23 81.58,90.17
S$17
  Bottom 0.025: 79.29,146.05 79.17,146.15 79,146.34 78.91,146.47 78.86,146.58 78.85,146.58 78.78,146.46 78.69,146.33 78.59,146.22 78.47,146.1 78.41,146.06 78.41,146.05 | 79.29,146.05 79.29,144.11 | 79.29,144.11 79.29,144.08 79.31,143.94 79.35,143.8 79.41,143.7 79.5,143.57 79.64,143.42 79.31,143.42 | 79.31,143.42 79.31,140.67 | 79.31,140.67 79.8,140.66 | 79.8,140.66 79.84,140.56 79.92,140.42 80,140.33 | 80,140.33 80.65,139.68 | 79.79,139.68 78.41,141.06 | 78.41,141.06 78.41,146.05 | 78.41,141.06 79.79,139.68 | 79.79,139.68 80.65,139.68 | 80,140.33 80.65,139.68 | 80,140.33 79.97,140.36 79.93,140.41 79.9,140.45 79.87,140.5 79.84,140.55 79.82,140.6 79.8,140.66 | 79.8,140.66 79.31,140.66 79.31,140.67 | 79.31,143.42 79.65,143.42 79.54,143.53 79.53,143.53 79.49,143.58 79.45,143.62 79.42,143.67 79.39,143.72 79.37,143.77 79.34,143.83 79.33,143.88 79.31,143.94 79.3,144 79.3,144.05 79.29,144.11 | 79.29,146.05 79.28,146.06 79.2,146.12 79.13,146.19 79.07,146.26 79,146.34 78.95,146.42 78.9,146.5 78.85,146.59 78.85,146.57 78.8,146.49 78.75,146.4 78.69,146.32 78.63,146.25 78.56,146.18 78.49,146.11 78.41,146.05
S$18
  Bottom 0.025: 145.71,87.16 148.53,89.98 148.53,90.16 148.43,90.25 148.28,90.37 148.16,90.54 148.07,90.71 148.05,90.68 148.01,90.6 147.92,90.46 147.78,90.31 147.68,90.21 147.55,90.12 147.41,90.04 147.21,89.96 147.07,89.93 146.9,89.91 146.9,89.9 146.72,89.9 146.48,89.94 146.28,90 146.13,90.07 145.99,90.16 145.8,90.32 145.64,90.5 145.56,90.64 145.5,90.76 145.45,90.92 145.43,91.01 145.41,90.99 145.39,90.9 145.32,90.75 145.26,90.65 145.2,90.56 | 145.71,87.54 143.01,87.54 | 143.01,87.54 143.01,87.77 | 143.01,87.77 143.01,87.78 142.99,87.95 142.95,88.08 142.91,88.16 142.84,88.27 142.76,88.37 142.54,88.57 142.54,88.58 | 144.17,90.11 144.15,90.11 143.95,90.14 143.82,90.19 143.63,90.28 143.51,90.37 143.38,90.48 143.24,90.67 143.17,90.8 143.14,90.87 143.11,90.94 143.1,91.01 143.08,91 143.05,90.89 143,90.73 142.95,90.62 142.85,90.48 142.75,90.36 142.6,90.22 142.54,90.17 | 144.17,90.11 144.39,90.11 144.57,90.14 144.7,90.19 144.88,90.28 145.02,90.38 145.17,90.52 145.17,90.53 145.2,90.56 | 142.54,88.58 142.54,90.17 | 142.54,88.58 142.77,88.36 142.78,88.34 142.81,88.3 142.85,88.25 142.88,88.21 142.91,88.16 142.94,88.11 142.96,88.05 142.98,88 142.99,87.94 143,87.88 143.01,87.83 143.01,87.77 | 143.01,87.54 145.71,87.54 | 145.71,87.16 145.71,87.54 | 145.71,87.16 148.53,89.98 148.53,90.16 148.5,90.18 148.42,90.24 148.35,90.31 148.28,90.38 148.22,90.46 148.16,90.54 148.11,90.62 148.07,90.71 148.03,90.64 147.98,90.55 147.93,90.47 147.87,90.4 147.8,90.33 147.73,90.26 147.66,90.19 147.58,90.14 147.49,90.09 147.41,90.04 147.32,90 147.22,89.97 147.13,89.94 147.04,89.92 146.94,89.91 146.84,89.9 146.74,89.9 146.64,89.91 146.55,89.92 146.45,89.94 146.36,89.97 146.27,90.01 146.18,90.05 146.09,90.09 146.01,90.14 145.93,90.2 145.85,90.27 145.78,90.33 145.72,90.41 145.66,90.48 145.6,90.57 145.56,90.65 145.51,90.74 145.48,90.83 145.45,90.92 145.42,91.02 145.42,91.01 145.4,90.93 145.37,90.85 145.33,90.77 145.29,90.7 145.25,90.63 145.2,90.56
  Bottom 0.025: 145.2,90.56 145.15,90.5 145.09,90.44 145.02,90.38 144.96,90.33 144.89,90.28 144.82,90.24 144.74,90.21 144.66,90.17 144.58,90.15 144.5,90.13 144.42,90.12 144.34,90.11 144.25,90.1 144.17,90.11 | 144.17,90.11 144.08,90.12 144,90.13 143.92,90.15 143.84,90.18 143.76,90.21 143.69,90.25 143.62,90.29 143.55,90.34 143.48,90.39 143.42,90.44 143.36,90.5 143.31,90.57 143.26,90.64 143.22,90.71 143.18,90.78 143.14,90.86 143.11,90.94 143.09,91.02 143.08,90.97 143.05,90.87 143.02,90.78 142.98,90.69 142.94,90.61 142.88,90.52 142.83,90.44 142.76,90.37 142.69,90.3 142.62,90.23 142.54,90.17
S$19
  Bottom 0.025: 55.99,101.72 49.64,101.72 | 49.64,101.72 49.64,106.16 | 49.64,106.16 55.99,106.16 | 55.99,106.16 55.99,101.72 | 55.99,101.72 55.99,101.71 49.64,101.71 49.64,101.72 | 49.64,106.16 55.99,106.16
S$20
  Bottom 0.025: 48.37,101.72 42.02,101.72 | 42.02,101.72 42.02,106.16 | 42.02,106.16 48.37,106.16 | 48.37,106.16 48.37,101.72 | 48.37,101.72 48.37,101.71 42.02,101.71 42.02,101.72 | 42.02,106.16 48.37,106.16
S$21
  Bottom 0.025: 18.97,90.17 18.85,90.27 18.68,90.46 18.59,90.59 18.53,90.71 | 18.97,90.17 18.97,88.23 | 18.97,88.23 18.97,88.2 18.99,88.06 19.02,87.92 19.08,87.82 19.18,87.69 19.32,87.54 18.98,87.54 | 18.98,87.54 18.98,84.79 | 18.98,84.79 19.47,84.78 | 19.47,84.78 19.52,84.68 19.59,84.54 19.68,84.45 | 19.68,84.45 20.33,83.8 | 19.47,83.8 19.46,83.8 18.09,85.18 | 18.53,90.71 18.4,90.48 18.29,90.36 18.15,90.22 18.09,90.17 | 18.09,85.18 18.09,90.17 | 18.09,85.18 19.47,83.8 | 19.47,83.8 20.33,83.8 | 19.68,84.45 20.33,83.8 | 19.68,84.45 19.64,84.48 19.61,84.53 19.57,84.57 19.54,84.62 19.52,84.67 19.49,84.72 19.47,84.78 | 19.47,84.78 18.98,84.78 18.98,84.79 | 18.98,87.54 19.32,87.54 19.21,87.64 19.2,87.66 19.16,87.7 19.13,87.74 19.1,87.79 19.07,87.84 19.04,87.89 19.02,87.95 19,88 18.99,88.06 18.98,88.11 18.97,88.17 18.97,88.23 | 18.97,90.17 18.96,90.18 18.88,90.24 18.81,90.31 18.74,90.38 18.68,90.46 18.62,90.54 18.57,90.62 18.53,90.71 | 18.53,90.71 18.52,90.69 18.48,90.61 18.42,90.52 18.37,90.44 18.3,90.37 18.23,90.3 18.16,90.23 18.09,90.17
S$23
  Bottom 0.025: 136,17.88 135.87,18.02 135.75,18.19 135.69,18.31 135.67,18.29 135.63,18.21 135.53,18.07 135.45,17.97 135.37,17.88 | 136,17.88 136,14.2 | 136,14.2 135.82,14.19 | 135.37,17.88 135.37,11.94 135.82,11.48 135.82,14.19 | 135.82,14.19 136,14.19 136,14.2 | 136,17.88 135.97,17.92 135.9,17.99 135.84,18.07 135.78,18.15 135.73,18.23 135.69,18.32 135.66,18.27 135.62,18.19 135.56,18.11 135.5,18.03 135.44,17.95 135.37,17.88
S$24
  Bottom 0.025: 143.62,17.88 143.49,18.02 143.38,18.19 143.31,18.31 143.29,18.29 143.25,18.21 143.15,18.07 143.02,17.92 142.91,17.82 142.79,17.73 142.65,17.65 142.45,17.57 142.3,17.54 142.14,17.52 142.14,17.51 141.96,17.51 141.72,17.55 141.52,17.61 141.37,17.68 141.23,17.77 141.04,17.93 140.88,18.11 140.8,18.25 140.74,18.37 140.7,18.51 140.66,18.62 140.65,18.62 140.63,18.5 140.56,18.36 140.5,18.26 140.44,18.17 | 143.62,17.34 140.48,14.19 | 137.91,17.88 137.91,14.19 140.48,14.19 | 137.91,17.88 138.09,18.09 138.18,18.24 138.23,18.34 138.29,18.5 138.32,18.62 138.33,18.62 138.36,18.52 138.41,18.4 138.47,18.27 138.62,18.09 138.75,17.98 138.87,17.89 139.06,17.8 139.19,17.75 139.39,17.72 139.41,17.72 | 139.41,17.72 139.62,17.72 139.81,17.75 139.94,17.8 140.12,17.89 140.26,17.99 140.41,18.13 140.41,18.14 140.44,18.17 | 137.91,17.88 137.98,17.95 138.04,18.03 138.1,18.11 138.16,18.19 138.2,18.27 138.25,18.36 138.28,18.45 138.31,18.55 138.33,18.63 138.35,18.55 138.38,18.47 138.41,18.39 138.45,18.32 138.5,18.25 138.55,18.18 138.6,18.11 138.66,18.05 138.72,18 138.79,17.95 138.85,17.9 138.93,17.86 139,17.82 139.08,17.79 139.16,17.76 139.24,17.74 139.32,17.73 139.41,17.72 | 140.48,14.19 143.62,17.34 | 143.62,17.34 143.62,17.88 | 143.62,17.88 143.59,17.92 143.52,17.99 143.46,18.07 143.4,18.15 143.35,18.23 143.31,18.32 143.27,18.25 143.22,18.16 143.17,18.09 143.11,18.01 143.04,17.93 142.97,17.87 142.89,17.8 142.81,17.75 142.73,17.7 142.64,17.65 142.56,17.61 142.46,17.58 142.37,17.55 142.27,17.53 142.17,17.52 142.08,17.51 141.98,17.51 141.88,17.52 141.78,17.53 141.69,17.55 141.59,17.58 141.5,17.62 141.41,17.66 141.33,17.7 141.24,17.75 141.17,17.81 141.09,17.88 141.02,17.95 140.96,18.02 140.9,18.09 140.84,18.18 140.79,18.26 140.75,18.35 140.71,18.44 140.69,18.53 140.66,18.63 140.66,18.62 140.63,18.54 140.61,18.46 140.57,18.38 140.53,18.31 140.49,18.24 140.44,18.17
  Bottom 0.025: 140.44,18.17 140.38,18.11 140.32,18.05 140.26,17.99 140.19,17.94 140.13,17.89 140.05,17.85 139.98,17.82 139.9,17.79 139.82,17.76 139.74,17.74 139.66,17.73 139.57,17.72 139.49,17.71 139.41,17.72
S$25
  Bottom 0.025: 168.52,27.32 169.34,27.31 | 169.34,27.31 169.34,23.22 | 169.34,23.22 168.32,23.22 168.32,20.64 165.6,20.64 165.6,20.65 164.44,21.82 164.31,21.9 164.21,21.95 164.08,22 163.85,22.02 158.23,22.02 158.1,22.01 157.97,21.99 157.77,21.91 157.67,21.84 | 157.67,21.84 157.6,21.79 156.84,21.02 156.53,20.71 156.46,20.6 156.41,20.52 | 156.41,20.52 156.3,20.43 156.13,20.22 156.06,20.11 155.99,19.98 155.96,19.89 155.93,19.8 155.9,19.7 155.87,19.81 155.83,19.9 155.75,20.07 155.62,20.23 155.46,20.38 155.32,20.47 155.23,20.5 155.09,20.56 154.96,20.59 154.84,20.61 154.59,20.61 154.47,20.58 154.35,20.55 154.24,20.51 154.13,20.45 154.01,20.38 153.83,20.21 153.71,20.04 153.63,19.88 153.59,19.77 153.56,19.64 153.54,19.44 153.54,18.85 153.56,18.69 153.59,18.55 153.64,18.42 153.72,18.27 153.81,18.15 154.01,17.95 154.2,17.85 154.34,17.78 154.44,17.75 154.67,17.71 154.84,17.71 154.84,17.72 154.96,17.74 155.09,17.76 155.2,17.8 155.39,17.91 155.49,17.98 155.62,18.1 155.72,18.22 155.81,18.38 155.87,18.51 155.9,18.62 155.93,18.5 155.99,18.34 156.05,18.22 156.17,18.04 156.32,17.88 | 156.32,17.88 156.32,17.69 | 156.32,17.69 155.85,17.69 | 155.85,17.69 155.85,17.49 | 155.85,17.49 153.81,17.48 | 153.81,15.73 153.81,15.72 152.06,17.47 152.06,17.48 | 147.25,18.85 147.25,19.27 152.06,19.27 152.06,17.48 | 147.25,18.85 146.24,18.85 145.98,19.11 145.98,19.47 145.97,19.48 145.97,19.63 145.94,19.75 145.89,19.88 145.86,19.97 145.79,20.12 145.7,20.26 145.56,20.41 145.38,20.56 145.25,20.64 145.14,20.7 145,20.75 144.88,20.79 144.69,20.81 144.47,20.81 144.34,20.8 144.2,20.77 144.08,20.73 143.94,20.67 143.85,20.61 143.71,20.52 143.53,20.36 143.45,20.25 143.36,20.12 143.31,20.02 143.3,20.01 143.3,20.02 143.25,20.11 143.2,20.19 143.09,20.35 142.93,20.5 142.8,20.59
  Bottom 0.025: 142.8,20.59 142.67,20.66 142.53,20.73 142.41,20.77 142.27,20.8 142.14,20.81 141.93,20.81 141.74,20.79 141.59,20.74 141.41,20.67 141.24,20.58 141.12,20.48 140.97,20.32 140.87,20.2 140.81,20.09 140.75,19.98 140.7,19.84 140.66,19.7 140.63,19.82 140.58,19.94 140.51,20.05 140.44,20.16 140.26,20.34 140.21,20.38 | 140.21,20.38 140.15,20.42 140.05,20.48 139.9,20.55 139.68,20.6 139.43,20.62 139.22,20.58 139.06,20.53 138.94,20.48 138.81,20.4 138.66,20.28 138.57,20.18 138.48,20.06 138.44,19.98 138.37,19.82 138.33,19.7 138.32,19.7 138.3,19.83 138.25,19.95 138.19,20.08 138.12,20.2 138.03,20.32 137.92,20.43 137.77,20.56 137.62,20.66 137.43,20.73 137.25,20.79 137.07,20.81 136.85,20.81 136.72,20.8 136.58,20.77 136.45,20.73 136.22,20.61 136.18,20.58 | 136.18,20.58 136.13,20.55 136.09,20.53 135.92,20.36 135.82,20.24 135.74,20.11 135.69,20.02 135.68,20.01 135.68,20.02 135.63,20.11 135.59,20.19 135.47,20.34 135.31,20.5 135.15,20.61 134.91,20.73 134.63,20.8 134.32,20.81 134.12,20.79 133.97,20.74 133.76,20.66 133.63,20.58 133.51,20.48 133.32,20.3 133.2,20.12 133.16,20.05 | 133.16,20.05 133.12,19.94 133.07,19.82 133.03,19.63 133.01,19.42 | 133.01,19.42 133.01,19.19 | 133.01,19.19 133.02,18.76 133.07,18.49 133.13,18.36 133.21,18.21 133.33,18.02 133.46,17.88 | 133.46,11.48 133.47,11.48 133.47,11.42 133.49,11.31 133.53,11.19 133.6,11.06 133.69,10.92 135.68,8.94 135.75,8.88 135.84,8.82 135.97,8.75 136.21,8.69 136.24,8.69 | 136.24,8.69 166.23,8.69 | 166.23,8.69 166.29,8.69 166.43,8.72 | 166.43,8.72 166.44,8.72 166.65,8.82 166.81,8.94 170.18,12.31 170.19,12.31 170.19,11.08 170.39,11.08 170.39,9.03 176.13,9.03 176.13,9.02 176.19,8.92 176,8.71 175.9,8.56 175.84,8.43 175.78,8.3 175.72,8.12 175.68,7.87 175.67,7.66 175.7,7.42 175.75,7.25 132.13,7.25 132.18,7.43 132.2,7.63 132.21,7.83 132.19,7.99 132.13,8.26 132.07,8.38 132,8.53 131.91,8.67 131.74,8.87 131.62,8.98 131.49,9.07 131.36,9.15 131.23,9.21 131.08,9.26 130.95,9.3 130.77,9.33 130.52,9.34 130.37,9.32 130.21,9.29 130.07,9.25 129.94,9.19 129.81,9.12
  Bottom 0.025: 129.81,9.12 129.81,24.12 | 129.81,24.12 129.82,24.12 129.86,24.09 129.9,24.07 | 129.9,24.07 129.96,24.04 130.24,23.95 130.52,23.91 130.72,23.91 130.72,23.92 130.79,23.92 130.91,23.95 131.07,23.98 131.16,24.01 131.29,24.07 131.45,24.15 131.59,24.25 131.73,24.38 131.91,24.57 132.07,24.87 132.12,24.97 132.17,25.16 132.2,25.39 132.2,25.61 132.19,25.77 132.15,25.94 132.1,26.09 132.03,26.26 131.85,26.53 131.7,26.68 131.57,26.8 131.35,26.93 131.23,26.99 131.08,27.05 130.92,27.09 130.73,27.11 130.5,27.11 130.36,27.1 130.21,27.07 130.07,27.03 129.96,26.98 129.81,26.9 | 129.81,28.22 168.52,28.22 | 168.52,28.22 168.52,27.32 | 166.43,8.72 166.49,8.74 166.55,8.77 166.61,8.8 166.67,8.83 166.73,8.87 166.78,8.91 166.83,8.95 170.19,12.31 170.19,11.07 170.39,11.07 170.39,9.03 176.13,9.03 176.14,9.01 176.14,9 176.19,8.91 176.12,8.84 176.04,8.75 175.97,8.66 175.91,8.57 175.86,8.47 175.81,8.37 175.77,8.27 175.74,8.16 175.71,8.05 175.69,7.94 175.68,7.83 175.68,7.72 175.68,7.61 175.69,7.5 175.72,7.39 175.74,7.28 175.75,7.25 132.13,7.25 132.16,7.36 132.18,7.47 132.2,7.58 132.21,7.69 132.2,7.8 132.2,7.92 132.18,8.02 132.16,8.13 132.12,8.24 132.09,8.34 132.04,8.45 131.99,8.54 131.93,8.64 131.86,8.73 131.79,8.81 131.71,8.89 131.62,8.97 131.54,9.04 131.44,9.1 131.35,9.15 131.24,9.2 131.14,9.24 131.03,9.28 130.93,9.3 130.81,9.32 130.7,9.33 130.59,9.34 130.48,9.33 130.37,9.32 130.26,9.3 130.15,9.27 130.04,9.23 129.94,9.19 129.84,9.14 129.81,9.12 | 166.43,8.72 166.36,8.71 166.3,8.69 166.23,8.69 | 166.23,8.69 166.17,8.69 136.3,8.69 136.24,8.69
  Bottom 0.025: 136.24,8.69 136.17,8.7 136.11,8.71 136.04,8.73 135.98,8.75 135.92,8.78 135.86,8.81 135.8,8.84 135.75,8.88 135.7,8.92 135.65,8.97 133.74,10.87 133.73,10.88 133.69,10.93 133.65,10.98 133.61,11.04 133.57,11.1 133.55,11.16 133.52,11.22 133.5,11.28 133.49,11.35 133.47,11.41 133.46,11.48 | 133.46,11.48 133.46,17.88 | 133.46,17.88 133.41,17.94 133.34,18.01 133.28,18.09 133.23,18.17 133.18,18.26 133.13,18.34 133.1,18.43 133.07,18.53 133.04,18.62 133.03,18.72 133.02,18.82 133.01,18.91 133.01,19.19 | 133.01,19.42 133.01,19.49 133.02,19.58 133.04,19.68 133.06,19.78 133.09,19.87 133.12,19.96 133.16,20.05 | 133.16,20.05 133.21,20.14 133.27,20.22 133.32,20.3 133.39,20.37 133.46,20.44 133.53,20.5 133.61,20.56 133.69,20.61 133.78,20.66 133.87,20.71 133.96,20.74 134.05,20.77 134.15,20.79 134.24,20.81 134.34,20.82 134.44,20.82 134.54,20.81 134.63,20.8 134.73,20.78 134.82,20.76 134.92,20.72 135.01,20.69 135.09,20.64 135.18,20.59 135.26,20.54 135.33,20.48 135.41,20.41 135.47,20.34 135.53,20.26 135.59,20.18 135.64,20.1 135.69,20.01 135.72,20.08 135.77,20.17 135.83,20.25 135.89,20.32 135.95,20.4 136.03,20.46 136.1,20.53 136.18,20.58 | 136.18,20.58 136.26,20.64 136.35,20.68 136.44,20.72 136.53,20.75 136.63,20.78 136.72,20.8 136.82,20.81 136.92,20.82 137.01,20.82 137.11,20.81 137.21,20.8 137.31,20.77 137.4,20.75 137.49,20.71 137.58,20.67 137.66,20.62 137.75,20.57 137.83,20.51 137.9,20.45 137.97,20.38 138.04,20.31 138.1,20.23 138.15,20.15 138.2,20.07 138.24,19.98 138.28,19.89 138.31,19.79 138.33,19.7 138.33,19.71 138.36,19.79 138.39,19.87 138.42,19.95 138.46,20.02 138.51,20.09 138.55,20.16 138.61,20.22 138.67,20.28 138.73,20.34 138.8,20.39 138.87,20.44 138.94,20.48 139.01,20.51 139.09,20.55 139.17,20.57 139.26,20.59 139.34,20.6 139.42,20.61 139.5,20.61 139.59,20.61 139.67,20.6 139.75,20.59 139.84,20.57 139.91,20.54 139.99,20.51 140.07,20.47 140.14,20.43 140.21,20.38
  Bottom 0.025: 140.21,20.38 140.27,20.33 140.34,20.27 140.39,20.21 140.45,20.15 140.5,20.08 140.54,20.01 140.58,19.93 140.61,19.86 140.64,19.78 140.66,19.7 140.68,19.78 140.71,19.87 140.74,19.96 140.78,20.05 140.83,20.14 140.89,20.22 140.94,20.3 141.01,20.37 141.08,20.44 141.15,20.5 141.23,20.56 141.31,20.61 141.4,20.66 141.49,20.71 141.58,20.74 141.67,20.77 141.76,20.79 141.86,20.81 141.96,20.82 142.06,20.82 142.16,20.81 142.25,20.8 142.35,20.78 142.44,20.76 142.54,20.72 142.63,20.69 142.71,20.64 142.8,20.59 | 142.8,20.59 142.88,20.54 142.95,20.48 143.03,20.41 143.09,20.34 143.15,20.26 143.21,20.18 143.26,20.1 143.31,20.01 143.34,20.07 143.39,20.16 143.44,20.24 143.5,20.32 143.57,20.39 143.64,20.46 143.71,20.52 143.79,20.58 143.87,20.63 143.96,20.68 144.05,20.71 144.14,20.75 144.24,20.77 144.33,20.8 144.43,20.81 144.53,20.82 144.62,20.82 144.72,20.81 144.82,20.8 144.91,20.77 145.01,20.75 145.1,20.71 145.19,20.68 145.28,20.63 145.36,20.58 145.44,20.52 145.51,20.46 145.59,20.39 145.65,20.32 145.71,20.24 145.77,20.16 145.81,20.07 145.86,19.98 145.89,19.89 145.92,19.8 145.95,19.7 145.96,19.61 145.97,19.51 145.98,19.42 145.98,19.11 146.24,18.85 147.25,18.85 | 152.06,17.48 153.81,15.73 | 153.81,15.73 153.81,17.48 | 153.81,17.48 155.85,17.48 155.85,17.49 | 155.85,17.69 156.32,17.69 | 156.32,17.88 156.26,17.95 156.19,18.02 156.14,18.09 156.08,18.18 156.03,18.26 155.99,18.35 155.95,18.44 155.93,18.53 155.9,18.63 155.89,18.58 155.87,18.5 155.83,18.43 155.8,18.35 155.75,18.28 155.71,18.21 155.66,18.14 155.6,18.08 155.54,18.02 155.48,17.97 155.41,17.92 155.34,17.87 155.26,17.84 155.19,17.8 155.11,17.77 155.03,17.75 154.94,17.73 154.86,17.72 154.78,17.71 154.69,17.71 154.61,17.72 154.53,17.73 154.44,17.75 154.36,17.77 154.28,17.8 154.21,17.84 154.13,17.87 154.06,17.92 154,17.97 153.93,18.02 153.87,18.08 153.81,18.14 153.76,18.21 153.72,18.28 153.68,18.35 153.64,18.43 153.61,18.5 153.58,18.58 153.56,18.66 153.55,18.75 153.54,18.83 153.53,18.91 153.53,19.42 153.54,19.47 153.54,19.55 153.56,19.63 153.57,19.71 153.6,19.79 153.63,19.87 153.66,19.95 153.7,20.02 153.75,20.09 153.79,20.16 153.85,20.22 153.91,20.28 153.97,20.34 154.04,20.39 154.11,20.44 154.18,20.48 154.25,20.51 154.33,20.55 154.41,20.57 154.5,20.59 154.58,20.6 154.66,20.61 154.74,20.61 154.83,20.61 154.91,20.6 154.99,20.59 155.07,20.57 155.15,20.54 155.23,20.51 155.31,20.47 155.38,20.43 155.45,20.38 155.51,20.33 155.57,20.27 155.63,20.21 155.69,20.15 155.74,20.08 155.78,20.01 155.82,19.93 155.85,19.86 155.88,19.78 155.9,19.7 155.93,19.8 155.96,19.89 155.99,19.98 156.04,20.07 156.09,20.16 156.14,20.24 156.2,20.32 156.27,20.39 156.34,20.46 156.41,20.52
  Bottom 0.025: 156.41,20.52 156.44,20.58 156.48,20.64 156.51,20.69 156.56,20.74 156.6,20.79 157.57,21.75 157.62,21.8 157.67,21.84 | 157.67,21.84 157.72,21.88 157.78,21.91 157.84,21.94 157.9,21.96 157.97,21.98 158.03,22 158.09,22.01 158.16,22.02 158.23,22.02 163.85,22.02 163.92,22.02 163.99,22.01 164.05,22 164.12,21.98 164.18,21.96 164.24,21.93 164.3,21.9 164.36,21.87 164.41,21.83 164.46,21.79 164.51,21.74 165.61,20.65 168.32,20.65 168.32,23.22 169.34,23.22 | 169.34,27.31 168.52,27.31 168.52,27.32 | 129.81,28.22 168.52,28.22 | 129.81,26.9 129.81,28.22 | 129.81,26.9 129.9,26.95 130,27 130.11,27.04 130.22,27.07 130.33,27.09 130.44,27.11 130.55,27.11 130.66,27.11 130.77,27.11 130.88,27.09 130.99,27.07 131.1,27.04 131.21,27 131.31,26.95 131.41,26.9 131.5,26.84 131.59,26.78 131.68,26.71 131.76,26.63 131.83,26.54 131.9,26.46 131.97,26.36 132.02,26.27 132.07,26.16 132.11,26.06 132.15,25.96 132.17,25.85 132.19,25.73 132.2,25.63 132.21,25.51 132.2,25.4 132.19,25.29 132.17,25.18 132.15,25.07 132.11,24.97 132.07,24.86 132.02,24.76 131.97,24.67 131.91,24.57 131.83,24.48 131.76,24.4 131.68,24.32 131.59,24.25 131.5,24.19 131.41,24.12 131.31,24.07 131.21,24.03 131.1,23.99 131,23.96 130.89,23.93 130.77,23.92 130.66,23.91 130.55,23.91 130.44,23.92 130.33,23.93 130.22,23.96 130.11,23.99 130.01,24.03 129.9,24.07 | 129.9,24.07 129.81,24.12
S$26
  Bottom 0.025: 113.05,22.12 113.11,22.07 113.2,21.95 113.2,21.93 113.31,21.96 113.31,21.97 | 113.05,23.77 113.05,23.78 113.25,23.78 113.25,26.33 110.29,26.34 110.29,26.45 110.32,26.51 110.36,26.57 110.4,26.68 110.45,26.8 110.48,26.97 110.48,27.19 110.48,27.2 110.47,27.28 110.45,27.4 110.4,27.52 110.36,27.64 110.29,27.75 | 110.29,29.23 110.29,29.26 110.28,29.27 110.27,29.36 110.24,29.52 110.24,30.94 109.02,30.95 108.99,31.14 108.96,31.22 108.9,31.36 108.85,31.45 | 108.85,31.45 108.97,31.48 109.08,31.52 109.2,31.58 109.35,31.7 109.37,31.72 | 109.37,31.72 109.99,32.34 | 109.99,32.34 110.09,32.45 110.09,32.46 | 110.09,32.46 110.16,32.55 110.21,32.67 110.26,32.8 110.29,32.98 110.29,33.03 | 110.29,34.41 110.29,34.44 110.28,34.45 110.27,34.55 110.24,34.7 110.24,36.11 108.86,36.12 | 108.86,36.12 108.86,40.01 | 108.86,40.01 109.83,40.02 109.83,40.24 110.08,40.24 110.2,40.26 110.31,40.29 110.42,40.33 110.53,40.39 110.67,40.48 110.8,40.6 110.9,40.71 110.97,40.81 111.02,40.92 113.31,40.92 | 113.05,22.12 113.07,22.11 113.08,22.09 113.1,22.08 113.11,22.07 113.13,22.05 113.14,22.04 113.15,22.02 113.21,21.93 113.23,21.94 113.25,21.95 113.27,21.95 113.29,21.96 113.31,21.97 | 113.31,21.97 113.31,40.92 | 113.31,40.92 111.02,40.92 111.01,40.9 110.98,40.83 110.93,40.76 110.89,40.7 110.84,40.63 110.78,40.58 110.73,40.52 110.66,40.47 110.6,40.42 110.53,40.38 110.46,40.34 110.38,40.31 110.31,40.29 110.23,40.27 110.15,40.25 110.07,40.24 109.99,40.24 109.91,40.24 109.83,40.25 109.83,40.01 108.86,40.01 | 108.86,36.12 110.24,36.12 110.24,34.7 110.25,34.67 110.26,34.61 110.28,34.54 110.28,34.48 110.29,34.41
  Bottom 0.025: 110.29,33.03 110.29,34.41 | 110.29,33.03 110.28,33.01 110.28,32.95 110.27,32.88 110.26,32.81 110.24,32.75 110.22,32.69 110.19,32.63 110.17,32.57 110.13,32.51 110.09,32.46 | 110.09,32.46 110.05,32.41 110.01,32.36 109.99,32.34 | 109.37,31.72 109.32,31.67 109.27,31.63 109.22,31.59 109.16,31.56 109.1,31.53 109.04,31.5 108.98,31.48 108.91,31.47 108.85,31.45 | 108.85,31.45 108.86,31.44 108.89,31.38 108.92,31.32 108.95,31.26 108.97,31.2 108.99,31.13 109,31.07 109.01,31 109.02,30.94 110.24,30.94 110.24,29.52 110.25,29.49 110.26,29.43 110.28,29.36 110.28,29.3 110.29,29.23 | 110.29,27.75 110.29,29.23 | 110.29,27.75 110.29,27.74 110.33,27.67 110.37,27.6 110.4,27.53 110.43,27.45 110.45,27.38 110.47,27.3 110.48,27.22 110.48,27.14 110.48,27.06 110.48,26.98 110.47,26.9 110.45,26.82 110.43,26.74 110.4,26.66 110.37,26.59 110.33,26.52 110.29,26.45 110.29,26.33 113.25,26.33 113.25,23.77 113.05,23.77 | 113.05,22.12 113.05,23.77
S$27
  Bottom 0.025: 83.21,199.33 83.19,199.33 82.99,199.37 82.86,199.41 82.67,199.5 82.55,199.59 82.42,199.71 82.28,199.88 82.22,200.01 82.2,200.04 82.07,200.04 82.04,199.95 81.99,199.84 81.89,199.7 81.79,199.58 81.64,199.44 81.58,199.4 81.58,199.39 | 83.21,199.33 83.43,199.33 83.61,199.37 83.74,199.41 83.92,199.5 84.06,199.6 84.21,199.74 84.21,199.75 84.24,199.78 | 84.24,199.78 84.31,199.87 84.36,199.97 84.4,200.04 84.52,200.03 84.54,199.98 84.6,199.85 84.68,199.72 84.84,199.54 85.03,199.38 85.17,199.29 85.32,199.22 85.52,199.16 85.76,199.12 85.94,199.12 85.94,199.13 86.11,199.15 86.25,199.18 86.45,199.26 86.59,199.34 86.72,199.43 86.83,199.53 86.96,199.68 87.05,199.81 87.17,199.81 87.2,199.76 | 87.2,199.76 87.33,199.59 87.47,199.47 87.57,199.38 87.57,199.2 84.86,196.5 84.75,196.54 | 84.75,196.54 84.75,196.76 | 84.75,196.76 82.05,196.76 | 82.05,196.76 82.05,196.99 | 82.05,196.99 82.05,197 82.03,197.17 81.99,197.3 81.95,197.38 81.88,197.49 81.8,197.59 81.58,197.79 | 81.58,197.79 81.58,199.39 | 81.58,197.79 81.81,197.58 81.82,197.56 81.85,197.52 81.89,197.47 81.92,197.43 81.95,197.38 81.98,197.32 82,197.27 82.02,197.22 82.03,197.16 82.04,197.1 82.05,197.05 82.05,196.99 | 82.05,196.76 84.75,196.76 | 84.75,196.54 84.75,196.38 87.57,199.21 87.57,199.38 87.54,199.4 87.46,199.46 87.39,199.53 87.32,199.6 87.26,199.68 87.2,199.76 | 87.2,199.76 87.15,199.84 87.11,199.93 87.07,199.86 87.02,199.77 86.97,199.69 86.91,199.62 86.84,199.54 86.77,199.48 86.69,199.41 86.62,199.36 86.53,199.31 86.45,199.26 86.36,199.22 86.26,199.19 86.17,199.16 86.08,199.14 85.98,199.13 85.88,199.12 85.78,199.12 85.68,199.13 85.59,199.14 85.49,199.16 85.4,199.19 85.31,199.23 85.22,199.27 85.13,199.31 85.05,199.37 84.97,199.42 84.89,199.49 84.82,199.56 84.76,199.63 84.7,199.71 84.64,199.79 84.59,199.87 84.55,199.96 84.52,200.05 84.49,200.14 84.46,200.24 84.46,200.23 84.44,200.15 84.41,200.07 84.37,199.99 84.33,199.92 84.29,199.85 84.24,199.78
  Bottom 0.025: 84.24,199.78 84.19,199.72 84.13,199.66 84.06,199.6 84,199.55 83.93,199.5 83.86,199.46 83.78,199.43 83.7,199.4 83.62,199.37 83.54,199.35 83.46,199.34 83.38,199.33 83.29,199.32 83.21,199.33 | 83.21,199.33 83.12,199.34 83.04,199.35 82.96,199.37 82.88,199.4 82.8,199.43 82.73,199.47 82.66,199.51 82.59,199.56 82.52,199.61 82.46,199.66 82.4,199.72 82.35,199.79 82.3,199.86 82.25,199.93 82.22,200 82.18,200.08 82.15,200.16 82.13,200.24 82.12,200.19 82.09,200.09 82.06,200 82.02,199.91 81.98,199.83 81.92,199.74 81.87,199.66 81.8,199.59 81.73,199.52 81.66,199.45 81.58,199.39
S$28
  Bottom 0.025: 79.94,196.76 80.28,196.76 80.14,196.91 80.04,197.04 79.98,197.14 79.95,197.28 79.94,197.31 79.87,197.26 79.69,197.18 79.62,197.17 79.62,198.66 79.69,198.65 79.87,198.57 79.93,198.53 79.93,199.39 79.81,199.49 79.64,199.68 79.55,199.81 79.49,199.92 79.48,199.92 79.42,199.8 79.31,199.65 79.2,199.53 79.05,199.39 79.02,199.38 | 79.94,196.76 79.94,194.01 | 79.94,194.01 80.43,194 | 80.43,194 80.48,193.9 80.55,193.76 81.31,193 81.31,192.99 | 80.42,192.99 80.42,193 79.02,194.39 79.02,197.32 79.11,197.26 79.29,197.18 79.36,197.17 79.36,198.66 79.29,198.65 79.11,198.57 79.02,198.51 | 79.02,198.51 79.02,199.38 | 79.02,198.51 79.02,194.39 80.42,192.99 | 80.42,192.99 81.31,192.99 | 81.31,192.99 80.64,193.67 80.6,193.7 80.57,193.75 80.53,193.79 80.5,193.84 80.48,193.89 80.45,193.94 80.43,194 | 80.43,194 79.94,194 79.94,194.01 | 79.94,196.76 80.28,196.76 80.17,196.87 80.16,196.88 80.12,196.92 80.09,196.96 80.06,197.01 80.03,197.06 80,197.11 79.98,197.17 79.96,197.22 79.95,197.28 79.94,197.34 79.93,197.39 79.93,197.45 79.93,199.39 79.92,199.4 79.84,199.46 79.77,199.53 79.7,199.6 79.64,199.68 79.58,199.76 79.53,199.84 79.49,199.93 79.47,199.88 79.42,199.8 79.36,199.72 79.31,199.64 79.24,199.56 79.17,199.5 79.1,199.43 79.02,199.38
S$29
  Bottom 0.025: 105.02,193.82 107.16,195.96 107.16,198.38 100.97,198.39 100.83,198.43 100.73,198.46 100.66,198.5 100.52,198.62 100.3,198.83 100.29,198.83 | 82.83,193.82 82.82,193.82 82.65,194 84.75,194.01 | 84.75,194.01 84.75,194.57 | 84.75,194.57 84.99,194.58 85.08,194.59 85.19,194.63 85.32,194.7 85.44,194.79 88.92,198.28 89.02,198.38 89.08,198.48 89.14,198.6 89.18,198.8 89.19,198.82 93.24,194.78 93.29,194.73 93.36,194.68 93.47,194.63 93.57,194.6 93.66,194.58 94.55,194.57 | 99.35,195.52 99.82,195.98 100.13,196.3 100.18,196.38 100.22,196.47 100.27,196.6 100.29,196.76 100.29,196.77 | 100.29,196.77 100.29,198.83 | 82.83,193.82 82.65,194 84.75,194 84.75,194.01 | 82.83,193.82 105.02,193.82 | 105.02,193.82 107.16,195.96 107.16,198.38 101.06,198.38 101,198.39 100.95,198.39 100.89,198.4 100.84,198.42 100.78,198.44 100.73,198.46 100.68,198.49 100.64,198.52 100.59,198.55 100.55,198.59 100.51,198.62 100.29,198.84 100.29,198.83 | 100.29,196.77 100.29,196.72 100.28,196.66 100.27,196.61 100.26,196.55 100.24,196.5 100.22,196.45 100.19,196.4 100.16,196.35 100.13,196.31 100.09,196.26 100.06,196.22 99.35,195.52 | 99.35,195.52 99.35,194 94.55,194 94.55,194.57 | 94.55,194.57 93.76,194.57 93.71,194.57 93.65,194.58 93.59,194.59 93.54,194.6 93.48,194.62 93.43,194.64 93.38,194.67 93.33,194.7 93.29,194.73 93.25,194.77 93.2,194.81 89.18,198.83 89.18,198.8 89.18,198.74 89.17,198.69 89.15,198.63 89.13,198.58 89.11,198.53 89.08,198.48 89.06,198.43 89.02,198.38 88.99,198.34 88.95,198.3 85.45,194.79 85.4,194.75 85.36,194.72 85.31,194.69 85.26,194.66 85.21,194.64 85.16,194.62 85.11,194.6 85.05,194.58 85,194.58 84.94,194.57 84.75,194.57
S$30
  Bottom 0.025: 176.55,9.42 176.61,9.38 176.7,9.25 176.7,9.23 176.81,9.26 176.81,9.27 | 176.55,11.07 176.55,11.08 176.75,11.08 176.75,13.63 173.79,13.63 173.79,13.75 173.82,13.81 173.85,13.87 173.9,13.98 173.95,14.1 173.98,14.27 173.98,14.39 173.98,14.55 173.95,14.7 173.9,14.82 173.85,14.94 173.79,15.05 | 173.79,16.53 173.79,16.56 173.78,16.57 173.77,16.67 173.74,16.82 173.74,18.24 172.52,18.25 172.49,18.45 172.45,18.56 172.4,18.66 172.35,18.75 | 172.35,18.75 172.47,18.78 172.57,18.82 172.7,18.88 172.85,19 172.87,19.02 | 172.87,19.02 173.49,19.64 | 173.49,19.64 173.59,19.75 173.59,19.76 | 173.59,19.76 173.66,19.86 173.71,19.98 173.76,20.1 173.79,20.28 173.79,20.33 | 173.79,21.71 173.79,21.74 173.78,21.75 173.77,21.85 173.74,22 173.74,23.41 172.52,23.42 | 172.52,23.42 172.52,27.31 | 172.52,27.31 173.33,27.32 | 173.33,27.32 173.33,28.22 | 173.33,28.22 176.81,28.22 | 176.55,9.42 176.57,9.41 176.58,9.39 176.6,9.38 176.61,9.37 176.63,9.35 176.64,9.34 176.65,9.32 176.71,9.23 176.73,9.24 176.75,9.25 176.77,9.25 176.79,9.26 176.81,9.27 | 176.81,9.27 176.81,28.22 | 173.33,28.22 176.81,28.22 | 173.33,27.32 173.33,27.31 172.52,27.31 | 172.52,23.42 173.74,23.42 173.74,22 173.75,21.97 173.76,21.91 173.78,21.84 173.78,21.77 173.79,21.71 | 173.79,20.33 173.79,21.71 | 173.79,20.33 173.78,20.31 173.78,20.25 173.77,20.18 173.76,20.11 173.74,20.05 173.72,19.99 173.69,19.93 173.66,19.87 173.63,19.81 173.59,19.76 | 173.59,19.76 173.55,19.7 173.51,19.66 173.49,19.64 | 172.87,19.02 172.82,18.97 172.77,18.93 172.72,18.89 172.66,18.86 172.6,18.83 172.54,18.8 172.48,18.78 172.41,18.77 172.35,18.75
  Bottom 0.025: 172.35,18.75 172.36,18.74 172.39,18.68 172.42,18.62 172.45,18.56 172.47,18.5 172.49,18.43 172.5,18.37 172.51,18.3 172.52,18.24 173.74,18.24 173.74,16.82 173.75,16.79 173.76,16.73 173.78,16.66 173.78,16.6 173.79,16.53 | 173.79,15.05 173.79,16.53 | 173.79,15.05 173.79,15.04 173.83,14.97 173.87,14.9 173.9,14.83 173.93,14.75 173.95,14.68 173.97,14.6 173.98,14.52 173.99,14.44 173.99,14.36 173.98,14.28 173.97,14.2 173.95,14.12 173.93,14.04 173.9,13.96 173.87,13.89 173.83,13.82 173.79,13.75 173.79,13.63 176.75,13.63 176.75,11.07 176.55,11.07 | 176.55,9.42 176.55,11.07
S$31